# Altium PCB PCB2.PcbDoc
Units mil, origin at the board's own origin, x right, y up, seen from the top; angles counter-clockwise.
Board outline 1318.9 x 2992.13 mil, 2 copper layers (Top Layer, Bottom Layer); 29 components, 24 nets, 153 pads, 26 vias.
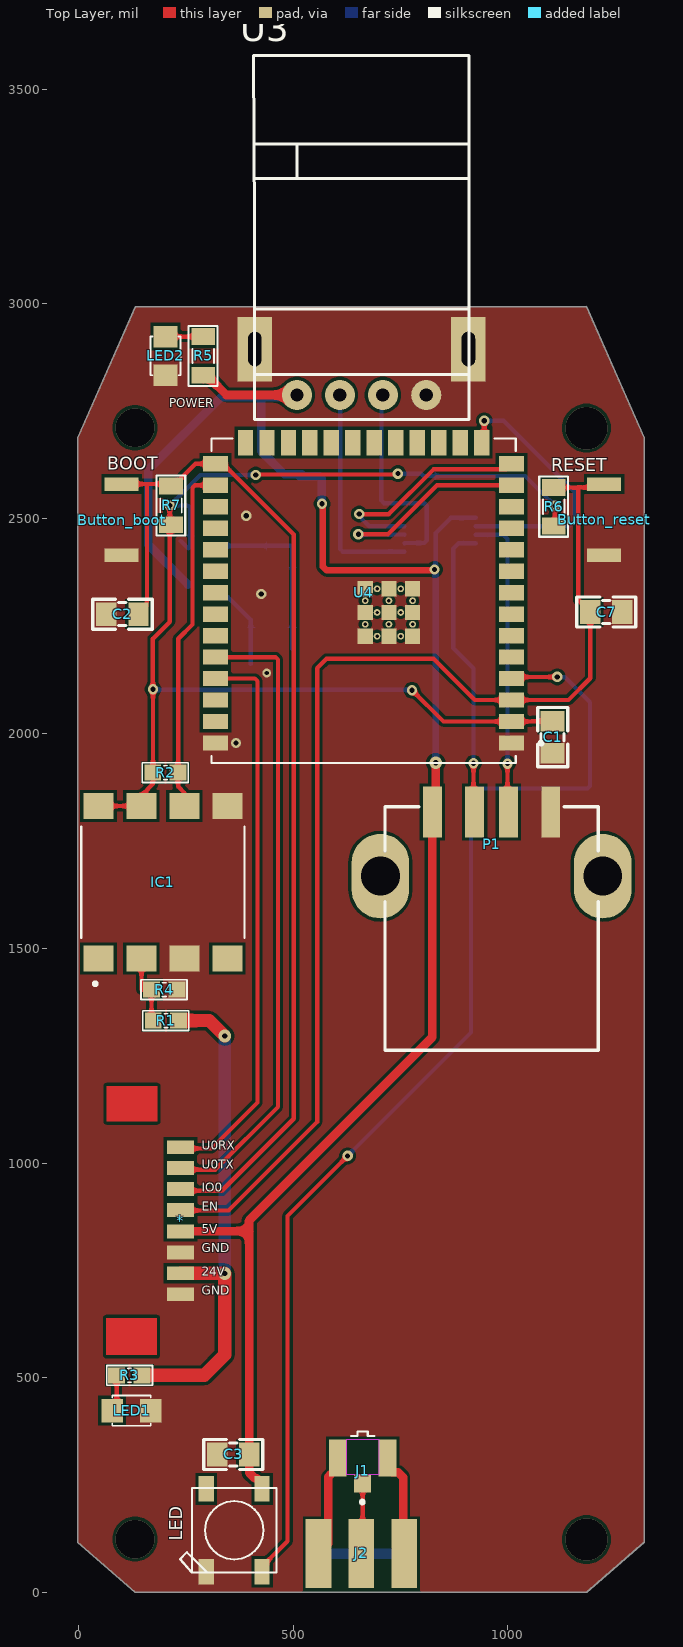
[diagram p0: Top Layer view]
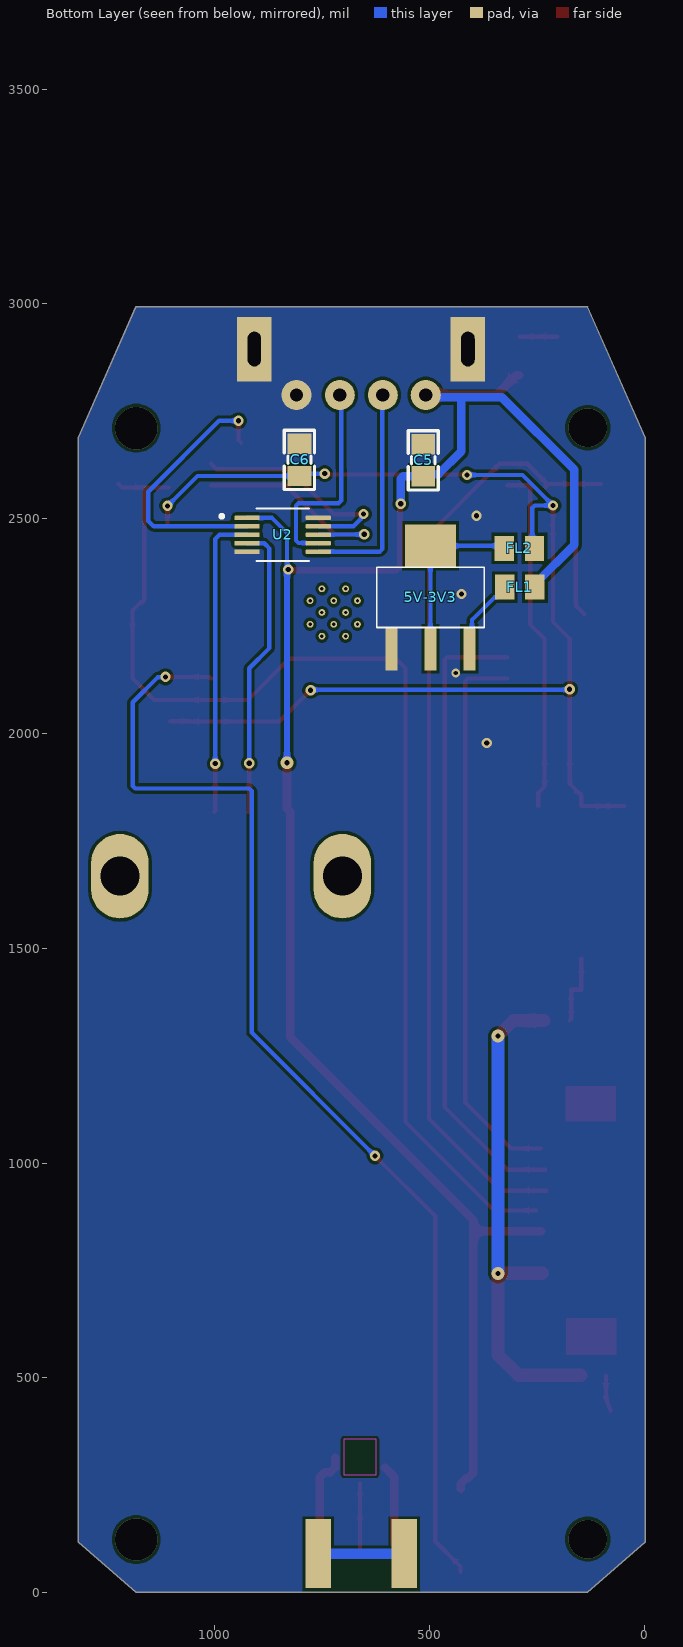
[diagram p1: Bottom Layer view, seen from below]
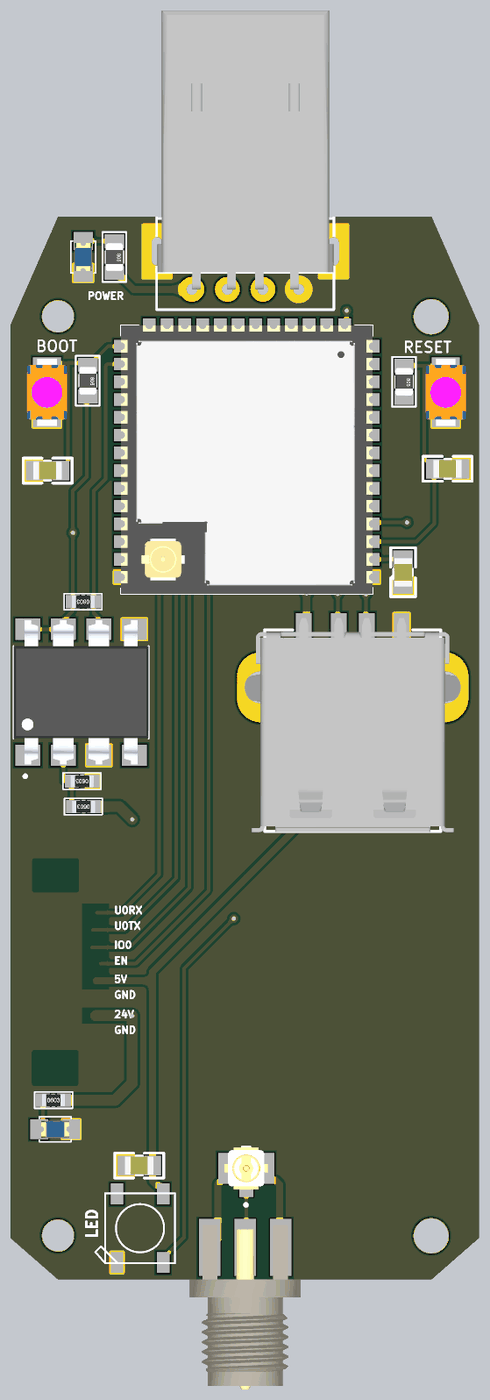
[diagram p2: 3D render of the assembled board from above, using the file's embedded part models]
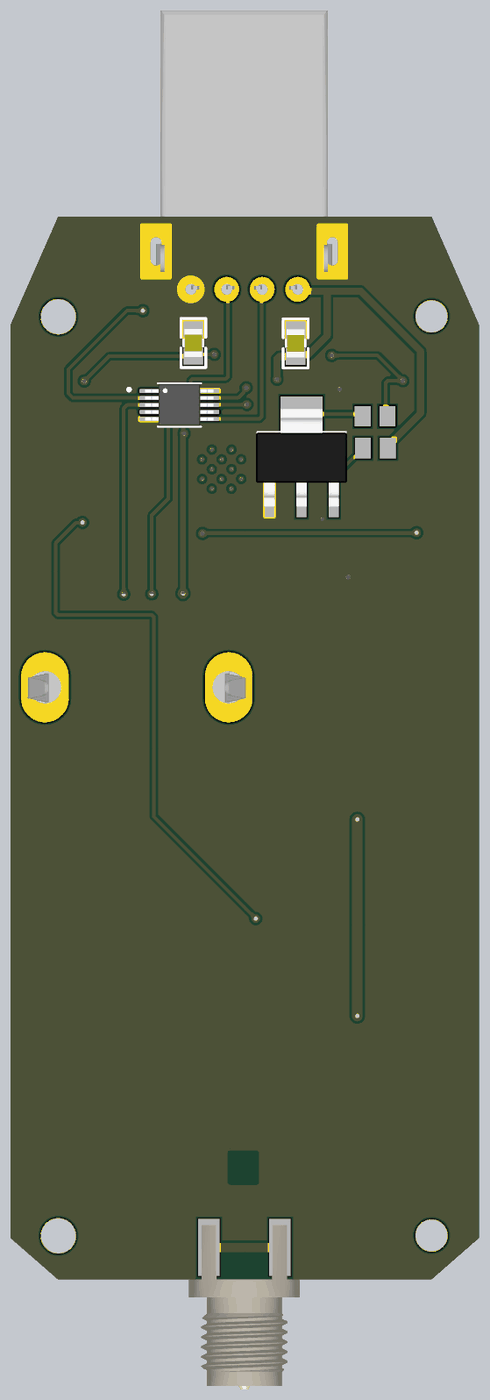
[diagram p3: 3D render of the assembled board from below, using the file's embedded part models]

## Layer stack, top to bottom
Top Solder: solder mask 0.4, Solder Resist, Dk 3.5
Top Layer: signal copper 1.4
Dielectric 1: dielectric 12.6, FR-4, Dk 4.8
Bottom Layer: signal copper 1.4
Bottom Solder: solder mask 0.4, Solder Resist, Dk 3.5

## Board outline
-1.45,560.08 -1.45,117.77 132.41,1.02 503,1.02 813,1.02 1183.59,1.02 1317.45,117.77 1317.45,2688.65 1183.59,2993.15 874.54,2993.15 441.46,2993.15 132.41,2993.15 -1.45,2688.65 -1.45,1174.25

## Design rules (kind name [scope] priority, off if disabled: settings)
Clearance [All] p1: gap=7 ignorepadtopadclearanceinfootprint=FALSE
PolygonConnect [All] p1: connectstyle=Direct reliefconductorwidth=10 reliefentries=4 polygonreliefangle="90 Angle" airgapwidth=10
RoutingVias [All] p1: holewidth=12 width=24 viastyle="Through Hole" minholewidth=10 minwidth=50 maxholewidth=18 maxwidth=50
SolderMaskExpansion [All] p1: expansion=4 istentingtop=FALSE
Width [All] p1: maxlimit=50 minlimit=10 preferedwidth=10 minimp=50.000000 maximp=50.000000 favimp=50.000000
30 further rules are at their usual default settings.

## Components (designator, comment, footprint, x,y, rotation, side; value= is the part's Value field where it differs from the comment)
5V-3V3 "LM1117-3.3V" LM1117-SOP 498,2247 r180 bottom
* "SMD" PCBComponent_1#1 45628,-45944 r270 top
Button_boot "Component_1" PCBComponent_1#2 101,2498.07 r90 top
Button_reset "Component_1" PCBComponent_1#2 1224,2498.07 r90 top
C1 "104" "tu 0805" 1104.13,1991.77 r270 top
C2 "104" "tu 0805" 102.77,2277.87 r180 top
C3 "104" "tu 0805" 360.77,321.87 r180 top
C5 "104" "tu 0805" 515,2636 r90 bottom
C6 "104" "tu 0805" 803,2637 r90 bottom
C7 "104" "tu 0805" 1229,2283 r0 top
FL1 "BLM21SP111SH1D" BEADC2012X105N 290,2341 r0 bottom
FL2 "BLM21SP111SH1D" BEADC2012X105N 290.96,2431 r180 bottom
IC1 "Component_1" COUPL_6N138SDM 197,1654 r90 top
J1 "20279-001E-03" IPEX_20279-001E-03 662,314 r0 top
J2 "SMA" "LINX CONREVSMA003.062" 659,1 r270 top locked
LED "WS2812B" WS2812B 363.04,145.54 r90 top
LED1 "LED_in_24V" SM-LED-0805-Blue 79,424 r0 top
LED2 "LED" SM-LED-0805-Blue 203,2924 r270 top
P1 "USB" USB-A-FEMALE-SMD 962,1668 r0 top
R1 "270" "tro smd 0603" 204,1332 r180 top
R2 "10K" "tro smd 0603" 203,1909 r180 top
R3 "270" "tro smd 0603" 119,506 r0 top
R4 "10K" "tro smd 0603" 200,1404 r180 top
R5 "4K7" RES-SMD-0805 291,2879 r270 top
R6 "4K7" RES-SMD-0805 1107,2528 r270 top
R7 "4K7" RES-SMD-0805 216,2531 r270 top
U2 "FSUSB42MUX" SOP50P490X110-10N 842.13,2462.68 r180 bottom
U3 "USB-A Through-Hole" USB-A 509,2788 r0 top locked
U4 "ESP32-S3-WROOM-1U" XCVR_ESP32-S3-WROOM-1U 664.06,2309.05 r180 top locked

## Footprints (in the part's own frame and the unit in brackets; to place one, negate y for a bottom-side part, rotate by r counter-clockwise, add the part's x,y. Pads: shape width x height; smd on the part's side, far side on the other; paste and mask are expansions set on the pad)
BEADC2012X105N [mm]
  rect 1.14x1.47 smd: 1(-0.89,0) 2(0.89,0)
COUPL_6N138SDM [mm]
  rect 1.52x1.78 smd: 1(-4.505,3.81) 2(-4.505,1.27) 3(-4.505,-1.27) 4(-4.505,-3.81) 5(4.505,-3.81) 6(4.505,-1.27) 7(4.505,1.27) 8(4.505,3.81)
  silkscreen extent -6.1,-4.83 3.3,4.83, body extent -5.15,-4.83 5.15,4.83, height 5.08
IPEX_20279-001E-03 [mm]
  rect 1x1.05 smd: 1(0,-1.525)
  rect 1.05x2.2 smd: 2(1.475,0) 3(-1.475,0)
  Keep-Out Layer region: 0.95,-1 -0.95,-1 -0.95,1.1 0.95,1.1
  silkscreen extent -0.7,-2.71 0.7,1.55, body extent -1.5,-1.55 1.5,1.55, height 1.25
"LINX CONREVSMA003.062" [mm] "RP-SMA FEMALE EDGE MOUNT FOR 0.062\" THICK BOARD"
  rect 4.06x1.52 smd: G(-2.3,2.54) G(-2.3,-2.54) S(-2.3,0)
  rect 4.06x1.52 smd far side: G(-2.3,2.54) G(-2.3,-2.54)
  body extent -3.9,-3.97 7.86,3.96, height 4.61
LM1117-SOP [mm]
  rect 0.7x2.54 smd: 1(-2.3,-1.27) 2(0,-1.27) 3(2.3,-1.27)
  rect 3x2.54 smd: 2(0,4.826)
  silkscreen extent -3.17,0 3.18,3.56, body extent -3.25,-1.78 3.25,5.18, height 1.68
PCBComponent_1#1 [mil]
  rect 31.89x62.99 smd: 0(-46981,-45390) 1(-46933,-45390) 2(-46884,-45390) 3(-46835,-45390) 4(-46785,-45390) 5(-46736,-45390) 6(-46688,-45390) 7(-46639,-45390)
  Top Layer region: -46584,-45563 -46497,-45563 -46497,-45445 -46584,-45445
  Top Layer region: -47124,-45562 -47041,-45562 -47041,-45444 -47124,-45444
  body extent -47112,-45573 -46508,-45363, height 139
PCBComponent_1#2 [mil]
  rect 31.5x78.74 smd: 1(-82.68,0) 2(82.68,0)
  body extent -94,-57 94,57, height 79
RES-SMD-0805 [mil]
  rect 39.37x55 smd: 1(-45,0) 2(45,0)
  silkscreen extent -70,-34 70,33, body extent -39,-25 39,25, height 31
SM-LED-0805-Blue [mil]
  rect 50x55 smd: 1(0,0) 2(90,0)
  silkscreen extent 0,-35 90,35, body extent 5,-25 85,25, height 43
SOP50P490X110-10N [mm]
  rrect50% 1.5x0.28 smd: 1(-2.105,1) 2(-2.105,0.5) 3(-2.105,0) 4(-2.105,-0.5) 5(-2.105,-1) 6(2.105,-1) 7(2.105,-0.5) 8(2.105,0) 9(2.105,0.5) 10(2.105,1)
  silkscreen extent -3.7,-1.55 1.55,1.55, body extent -2.45,-1.5 2.45,1.5, height 1.1
"tro smd 0603" [mm] "Chip Capacitor, 2-Leads, Body 1,60x0,80mm, IPC Medium Density"
  rect 1x0.95 smd mask+0.076: 1(-0.75,0) 2(0.75,0)
  silkscreen extent -1.35,-0.58 1.37,0.58, body extent -0.82,-0.42 0.82,0.43, height 0.44
"tu 0805" [mm] "Compoment SMD 80x50mil"
  rect 1.2x1.4 smd: 1(-0.946,-0.003) 2(0.954,-0.003)
  silkscreen extent -1.75,-0.89 1.75,0.89, body extent -1.01,-0.64 1.01,0.63, height 0.61
USB-A [mil]
  round 70 hole 31: 1(0,0) 2(100,0) 3(200,0) 4(301,0)
  rect 80x150 hole 31 slot 80 at 90 deg: 5(-98,107) 6(399,107)
  silkscreen extent -101,-57 401,790, body extent -97,0 399,784, height 177
USB-A-FEMALE-SMD [mm]
  rect 1.12x3 smd: 1(-3.5,3.8) 2(-1,3.8) 3(1,3.8) 4(3.5,3.8)
  oval 3.4x5 hole 2.3: G1(-6.575,0) G2(6.575,0)
  silkscreen extent -6.3,-10.3 6.3,4.1, body extent -7.8,-10.35 7.8,4.96, height 7.7
WS2812B [mm]
  rect 1.5x0.9 smd: 1-VDD(2.45,-1.65) 2-DOUT(2.45,1.65) 3-GND(-2.45,1.65) 4-DIN(-2.45,-1.65)
  silkscreen extent -2.5,-2.5 2.5,3.2
XCVR_ESP32-S3-WROOM-1U [mm]
  rect 1.5x0.9 smd: 1(-8.75,8.41) 2(-8.75,7.14) 3(-8.75,5.87) 4(-8.75,4.6) 5(-8.75,3.33) 6(-8.75,2.06) 7(-8.75,0.79) 8(-8.75,-0.48) 9(-8.75,-1.75) 10(-8.75,-3.02) 11(-8.75,-4.29) 12(-8.75,-5.56) 13(-8.75,-6.83) 14(-8.75,-8.1) 27(8.75,-8.1) 28(8.75,-6.83) 29(8.75,-5.56) 30(8.75,-4.29) 31(8.75,-3.02) 32(8.75,-1.75) 33(8.75,-0.48) 34(8.75,0.79) 35(8.75,2.06) 36(8.75,3.33) 37(8.75,4.6) 38(8.75,5.87) 39(8.75,7.14) 40(8.75,8.41)
  rect 0.9x1.5 smd: 15(-6.985,-9.35) 16(-5.715,-9.35) 17(-4.445,-9.35) 18(-3.175,-9.35) 19(-1.905,-9.35) 20(-0.635,-9.35) 21(0.635,-9.35) 22(1.905,-9.35) 23(3.175,-9.35) 24(4.445,-9.35) 25(5.715,-9.35) 26(6.985,-9.35)
  rect 0.9x0.9 smd: 41_1(-2.9,2.09) 41_2(-1.5,2.09) 41_3(-0.1,2.09) 41_4(-2.9,0.69) 41_5(-1.5,0.69) 41_6(-0.1,0.69) 41_7(-2.9,-0.71) 41_8(-1.5,-0.71) 41_9(-0.1,-0.71)
  round 0.4 hole 0.2 mask+0: 41_10(-2.2,2.09) 41_11(-0.8,2.09) 41_12(-2.9,1.39) 41_13(-1.5,1.39) 41_14(-0.1,1.39) 41_15(-2.2,0.69) 41_16(-0.8,0.69) 41_17(-2.9,-0.01) 41_18(-1.5,-0.01) 41_19(-0.1,-0.01) 41_20(-2.2,-0.71) 41_21(-0.8,-0.71)
  silkscreen extent -10.6,-9.6 9,9.6, body extent -9,-9.6 9,9.6, height 3.35

## Part data
5V-3V3: library part LM1117, "800mA Low-Dropout Linear Regulator", Creator="Nguyen Ba Bien", Website=http://group3i.net
*: library part Component_1
C1 C2 C3 C5 C6 C7: library part "Tu 0805 104 50V 10%", "Dán", Chung_Loai=Dán, Don_Vi=Con, Ma_Hang=MH004551, So_Chan=2, Ten_Linh_Kien="Tụ 0805 104-100nF 10% 50V"
FL1 FL2: Package=None, Availability=Unavailable, MP=BLM21SP111SH1D, Price=None
J1: "1 POS Vertical SMD Small form factor with big performance through 6 GHz connector,MHF, RF, micro-coaxial MHF I Receptacle", Package=None, Check_prices=https://www.snapeda.com/parts/20279-001E-03/I-PEX/view-part/?ref=eda, MF=I-PEX, MP=20279-001E-03, SnapEDA_Link=https://www.snapeda.com/parts/20279-001E-03/I-PEX/view-part/?ref=snap
J2: library part "RF Connector - SMA"
LED: "Raspberry Pi HAT _40 pin_ Wheeled Robotics Kit", Package=None, Availability=Unavailable, MF="SparkFun Electronics", MP=WS2812B, Price=None, SnapEDA_Link=https://www.snapeda.com/parts/WS2812B/Worldsemi/view-part/1038297/?ref=snap
LED1: library part LED
R1 R2 R3 R4: library part "Tro 0603 5% 1k", "Dán", Chung_Loai=Dán, Don_Vi=Con, Ma_Hang=MH006319, So_Chan=2, Ten_Linh_Kien="Trở 0603 5% 1k"
R5 R6 R7: library part R, "Resistor R1/4W"
U2: "FSUSB42 Series DPDT 4.3 V 480 Mbps SMT Hi Speed USB 2.0 Switch - MSOP-10", Package="MSOP-10 ON Semiconductor", Check_prices=https://www.snapeda.com/parts/FSUSB42MUX/Onsemi/view-part/?ref=eda, MF="ON Semiconductor", MP=FSUSB42MUX, SnapEDA_Link=https://www.snapeda.com/parts/FSUSB42MUX/Onsemi/view-part/?ref=snap
U3: library part "USB-A TH"
U4: "2.4 GHz Wi-Fi (802.11 b/g/n) and Bluetooth 5 (LE) module", Package=Package, Availability="Not in stock", Check_prices=https://www.snapeda.com/parts/ESP32-S3-WROOM-1U/Espressif+Systems/view-part/?ref=eda, MF="Espressif Systems", MP=ESP32-S3-WROOM-1U, Price=None, SnapEDA_Link=https://www.snapeda.com/parts/ESP32-S3-WROOM-1U/Espressif+Systems/view-part/?ref=snap

## Via types
v1: diameter 24, hole 12, Top Layer to Bottom Layer, tented both sides, 18 vias
v2: diameter 30, hole 12, Top Layer to Bottom Layer, tented both sides, 3 vias
v3: diameter 90, hole 90, Top Layer to Bottom Layer, 2 vias
v4: diameter 98.42, hole 98.42, Top Layer to Bottom Layer, 1 vias
v5: diameter 98.43, hole 98.42, Top Layer to Bottom Layer, 1 vias
v6: diameter 20, hole 10, Top Layer to Bottom Layer, tented both sides, 1 vias

## Nets (pads, with @x,y where several pads share a name; then routed paths per layer and width w, separated by ;. In a path a pad name is that pad's centre, name@x,y a point inside that pad or via, vN(x,y) a via of type N, cw(c..) or ccw(c..) an arc to the next point about the centre after c; other vN are vias at no path point)
3V3: C1.1 C6.1 FL2.2 IC1.7 IC1.8 R2.2 R6.2 R7.2 U4.2 | length 2965.4
  Top Layer w10: IC1.8 IC1.7 147,1856 173.47,1882.47 R2.2 174,1909.53 v1(174,2103) 173.47,2103.53 173.47,2220.47 213,2260 R7.2@213,2483 ; v1(213,2531) 213,2489 R7.2 ; v1(413,2602) 414,2603 742,2603 v1(744,2605) ; v1(777,2101) 850.06,2027.94 1055,2027.94 1056.06,2029 C1.1 ; R6.2 1110,2486 v1(1110,2530)
  Bottom Layer w10: v1(174,2103) 175,2102 776,2102 v1(777,2101) ; FL2.2@238.48,2448.44 FL2.2 261,2436.08 261,2525 255,2531 v1(213,2531) 284,2602 v1(413,2602) ; v1(744,2605) 797.64,2605 C6.1 1040.23,2599.77 v1(1110,2530)
5V: *.4 C3.1 C5.1 FL1.1 LED.1-VDD P1.1 R5.2 U2.1 U3.1 | length 4417.2
  Top Layer w15: v1@569,2534.65 568.94,2534.6 568.94,2526.91 569,2526.86 569,2388.79 577.79,2380 827,2380 v1(829,2382)
  Top Layer w20: *.4@240,842 398,842 ; R5.2 298.81,2834 344.82,2788 U3.1 ; LED.1-VDD 428,253.81 415.28,266.53 410.91,266.53 398,279.44 C3.1 398,842 ; v2(832,1932) 832,1825.4 P1.1 824.21,1293.21 398,867 398,842
  Bottom Layer w10: v1@832,2381 832,2467 867.06,2502.06 U2.1
  Bottom Layer w15: v2(832,1932) v1@832,2381
  Bottom Layer w20: FL1.1@254.47,2347 254.47,2347.99 163,2439.46 163,2614 332,2783 426,2783 ; U3.1 504,2783 426,2783 ; C5.1 561.14,2598.77 567.22,2592.69 v1(567.22,2535) ; C5.1@524.87,2598.77 519.66,2603.98 479.02,2603.98 426,2657 426,2783
24V: *.6 R1.1 R3.2 | length 1180.2
  Top Layer w30: R1.1 305,1332 v2(341,1296)
  Top Layer w31: R3.2 293,506 341,554 v2(341,743) 340,744 *.6
  Bottom Layer w30: v2(341,743) v2(341,1296)
D+: U2.7 U3.3 | length 492.8
  Bottom Layer w10: U3.3 706,2785 706,2616.97 705.57,2616.54 705.57,2542.48 711.86,2536.19 805.14,2536.19 811,2530.33 811,2449.37 805.14,2443.51 759.76,2443.51 U2.7
D-: U2.6 U3.2 | length 510.8
  Bottom Layer w10: U3.2 610,2787 610,2429.4 615.86,2423.55 759.02,2423.55 U2.6
EN: *.3 Button_reset.2 C7.1 R6.1 U4.3 | length 2729.4
  Top Layer w10: *.3@252.55,890 350,890 556,1096 556,2152 578,2174 827,2174 923.06,2077.94 U4.3 1140.94,2077.94 1191.77,2128.77 1191.77,2286.8 1173.15,2305.43 1169.86,2305.43 1164,2311.28 1164,2570.63 1161.62,2573 R6.1 ; 1161.63,2573 1216.25,2573 Button_reset.2
ESP_D+: U2.9 U4.14 | length 523.8
  Top Layer w10: v1(654,2511) 654.61,2510.39 722.39,2510.39 827,2615 978.17,2615 978.39,2615.23 995.84,2615.23 U4.14
  Bottom Layer w10: v1(654,2511) 654,2507.21 660.38,2500.83 660.38,2499.2 677.21,2482.37 U2.9
ESP_D-: U2.8 U4.13 | length 511.5
  Top Layer w10: v1(652,2464) 721.06,2464 835,2577.94 U4.13
  Bottom Layer w10: v1(652,2464) 652.8,2463.2 758.74,2463.2 U2.8
GND: 5V-3V3.1 *.5 *.7 Button_boot.1 Button_reset.1 C1.2 C2.2 C3.2 C5.2 C6.2 C7.2 IC1.3 IC1.5 LED1.2 LED2.2 LED.3-GND P1.4 R4.1 U2.5 U2.10 U3.4 U3.5 U3.6 U4.1 U4.40 U4.41_1 U4.41_2 U4.41_3 U4.41_4 U4.41_5 U4.41_6 U4.41_7 U4.41_8 U4.41_9
  other v1: 367,1977.94 426,2325 391,2507
  other v6: 439,2141
IO0: *.2 Button_boot.2 C2.1 R7.1 U4.27 | length 2515.9
  Top Layer w10: Button_boot.2 160,2580.75 ; C2.1 158.62,2296.62 158.62,2305.04 160,2306.42 160,2581 194.19,2581 208.19,2581 216,2581 222,2581 230,2573 230,2585 272.94,2627.94 U4.27 337.06,2627.94 501.61,2463.39 501.61,1103.61 334,936 *.2@228.11,936
IOHIGHSPEED: IC1.6 R2.1 U4.28 | length 816.6
  Top Layer w10: IC1.6 247,1862 232.53,1876.47 R2.1 232.53,2220.53 266,2254 266,2572.09 271.86,2577.94 U4.28
LED_LOAD: LED.4-DIN U4.4 | length 2703.9
  Top Layer w10: LED.4-DIN 428,60.9 487,119.9 487,877 v1(627,1017) ; U4.4 1012.46,2131.86 1114.86,2131.86 v1(1115,2132)
  Bottom Layer w10: v1(627,1017) 914,1304 914,1866.14 919.86,1872 1185.14,1872 1191,1877.86 1191,2073 1132.59,2131.41 1115.59,2131.41 v1(1115,2132)
Net5V-3V3_2: 5V-3V3.2 FL2.1 | length 418
  Bottom Layer w10: FL2.1 326,2437 498,2437 5V-3V3.2@498,2197
Net5V-3V3_3: 5V-3V3.3 FL1.2 | length 214.3
  Bottom Layer w10: FL1.2 325.04,2334.5 342.48,2317.06 348.98,2317.06 401.39,2264.65 5V-3V3.3@401.39,2162.11
NetIC1_2: IC1.2 R1.2 R4.2 | length 169.8
  Top Layer w10: IC1.2 147,1404 R4.2 170.47,1336 R1.2
NetJ1_1: J1.1 J2.S | length 163.7
  Top Layer w10: J2.S 662,94.55 J1.1
NetJ1_2: J1.2 J1.3 J2.G | length 666.2
  Top Layer w20: J2.G@559,91.55 582,114.55 582,269.74 587.95,275.69 588.26,275.69 J1.3@603.93,291.36 ; J1.2 720.07,291.36 730.74,280.69 744.28,280.69 756,268.98 756,94.55 J2.G@759,91.55
  Bottom Layer w25: J2.G@559,91.55 559,91 759,91 J2.G@759,91.55
NetLED1_1: LED1.1 R3.1 | length 84.3
  Top Layer w10: LED1.1 LED1.1@86.96,446.5 ; LED1.1@86.96,446.53 cw(c114.75,424.05) 89.47,449.33 R3.1
NetLED2_1: LED2.1 R5.1 | length 88
  Top Layer w10: LED2.1 246,2924 R5.1
SEL_USB: U2.2 U4.15 | length 634.9
  Top Layer w10: U4.15 945,2683.09 v1(945,2728)
  Bottom Layer w10: U2.2 1142.37,2482.37 1155,2495 1155,2563 990,2728 v1(945,2728)
U0RX: *.0 U4.37 | length 1300.6
  Top Layer w10: *.0@241.65,1034 310,1034 417,1141 417,2122 411.06,2127.94 U4.37
U0TX: *.1 U4.36 | length 1484.1
  Top Layer w10: *.1@230.28,985 319,985 465,1131 465,2172.09 459.14,2177.94 U4.36
USB_D+: P1.3 U2.3 | length 714.3
  Top Layer w10: v1(999,1930) 999,1819.98 P1.3
  Bottom Layer w10: U2.3 989.14,2462.69 999,2452.83 v1(999,1930)
USB_D-: P1.2 U2.4 | length 690.9
  Top Layer w10: v1(920,1931) 920,1820.24 P1.2
  Bottom Layer w10: v1(920,1931) 920,2152 873,2199 873,2430.89 885.11,2443 U2.4
pads on no net: IC1.1 IC1.4 LED.2-DOUT P1.G1 P1.G2 U4.5 U4.6 U4.7 U4.8 U4.9 U4.10 U4.11 U4.12 U4.16 U4.17 U4.18 U4.19 U4.20 U4.21 U4.22 U4.23 U4.24 U4.25 U4.26 U4.29 U4.30 U4.31 U4.32 U4.33 U4.34 U4.35 U4.38 U4.39 U4.41_10 U4.41_11 U4.41_12 U4.41_13 U4.41_14 U4.41_15 U4.41_16 U4.41_17 U4.41_18 U4.41_19 U4.41_20 U4.41_21
copper on no net:
  other v3: 132,125 132,2712
  other v4: 1183,2711
  other v5: 1183,124

## Polygon pours and split planes (outlines as drawn)
GND on Top Layer "GND_L01_P001" (solid, remove dead copper, pour order 1): 132.43,2993.14 1182,2996 1245.26,2852.87 1318,2688 1317.45,117.77 1183.57,1 132.43,1 -2,118 -1,119 -1,2689.67
GND on Bottom Layer "GND_L02_P000" (solid, remove dead copper, pour order 0): 133,2992 134,2993 1184,2993 1243.16,2857.63 1318,2686 1318,118 1305.54,107.38 1184,1 132.39,1 -2,118 -1,119 -1,2689

## Silkscreen, mask and mechanical layers (free items; w line width, h text height)
Top Overlay:
  text "POWER" at 212,2760 h20
  text "BOOT" at 67,2614 h30
  text "RESET" at 1101,2611 h30
  text "U0RX" at 287,1031 h20
  text "U0TX" at 287,987 h20
  text "IO0" at 287,933 h20
  text "EN" at 287,889 h20
  text "5V" at 287,837 h20
  text "GND" at 287,793 h20
  text "24V" at 287,738 h20
  text "GND" at 287,694 h20
Mechanical 1:
  circle w5: c1183.59,2711.65 r49.21
  circle w0.5: c132.41,2711.65 r49.21
  circle w5: c132.41,125.04 r49.21
  circle w5: c1183.59,125.04 r49.21
  lines w0.5: -1.45,560.08 -40.82,560.08 -40.82,1174.25 -1.45,1174.25 ; 504,-112.98 504,117.7 814,117.7
  lines w5: -1.45,117.77 132.43,1 1183.57,1 1317.45,117.77 1317.45,2688.65 1183.59,2993.15 132.41,2993.15 -1.45,2688.65 -1.45,1174.25 -1.45,560.08 -1.45,117.77